# EAGLE board VCF-LM358-Stereo (EAGLE 7.6.0)
Voltage-Controlled Low-Pass Filter using LM358 Dual-Opamp (Stereo) http://electro-music.com/forum/topic-45231-0.html&postdays=0&postorder=asc&highlight=
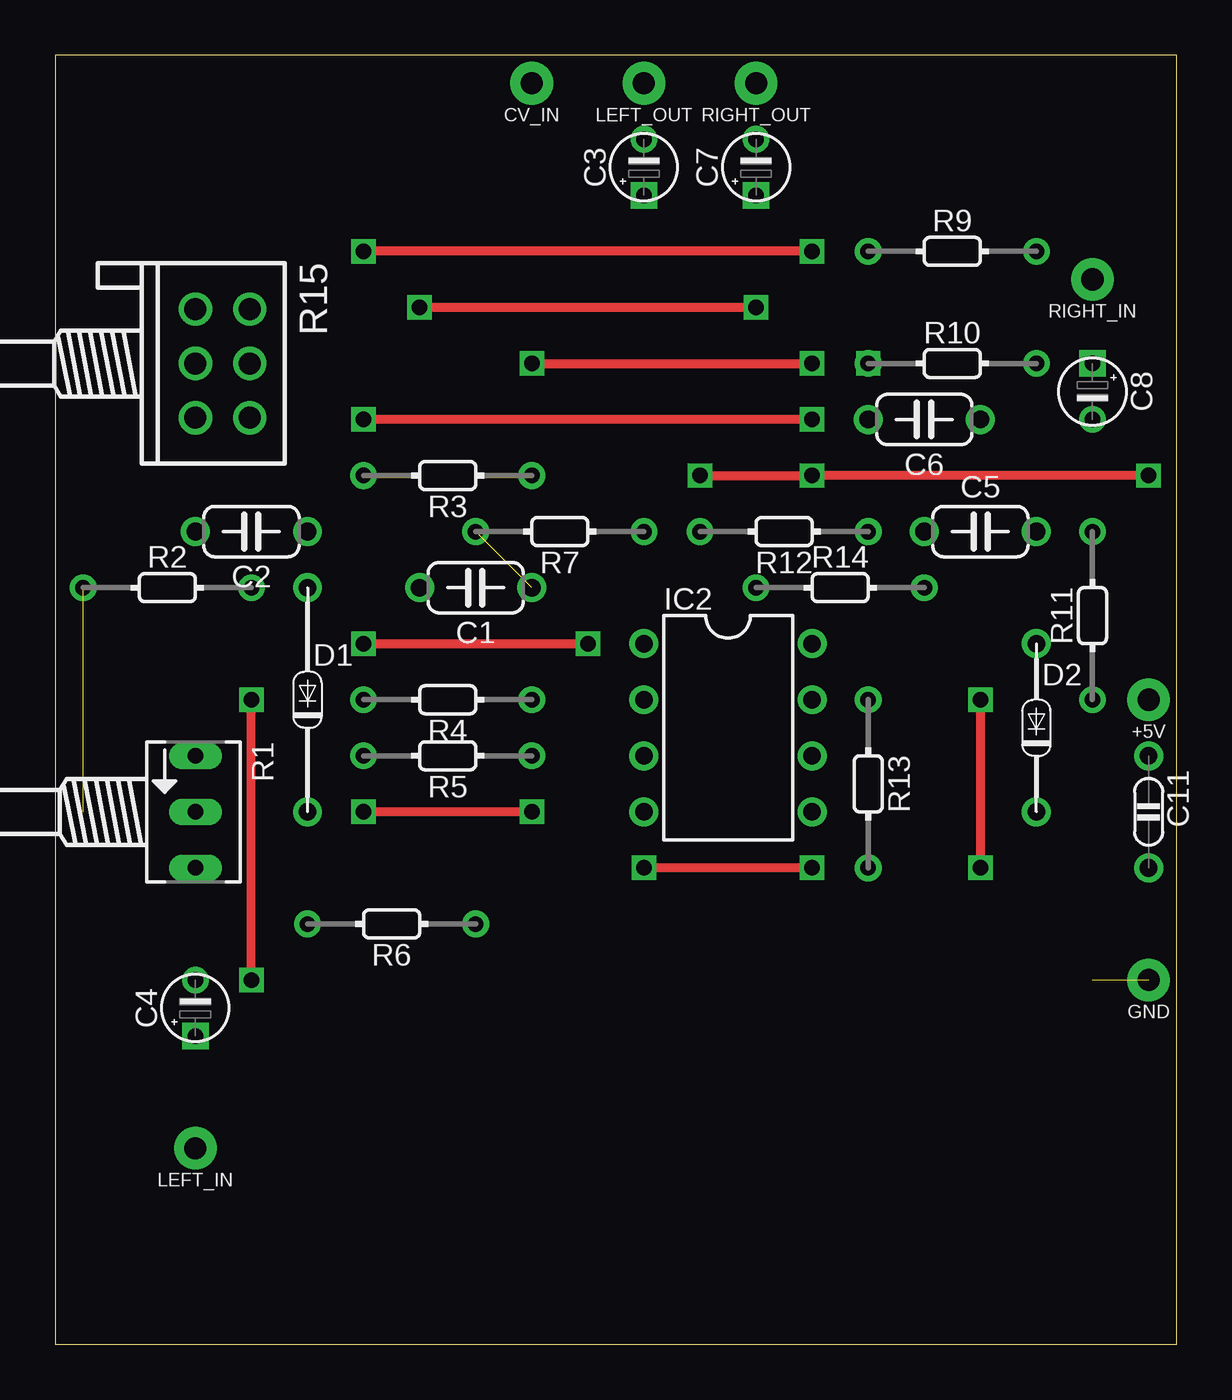
[diagram p0: board, top side]
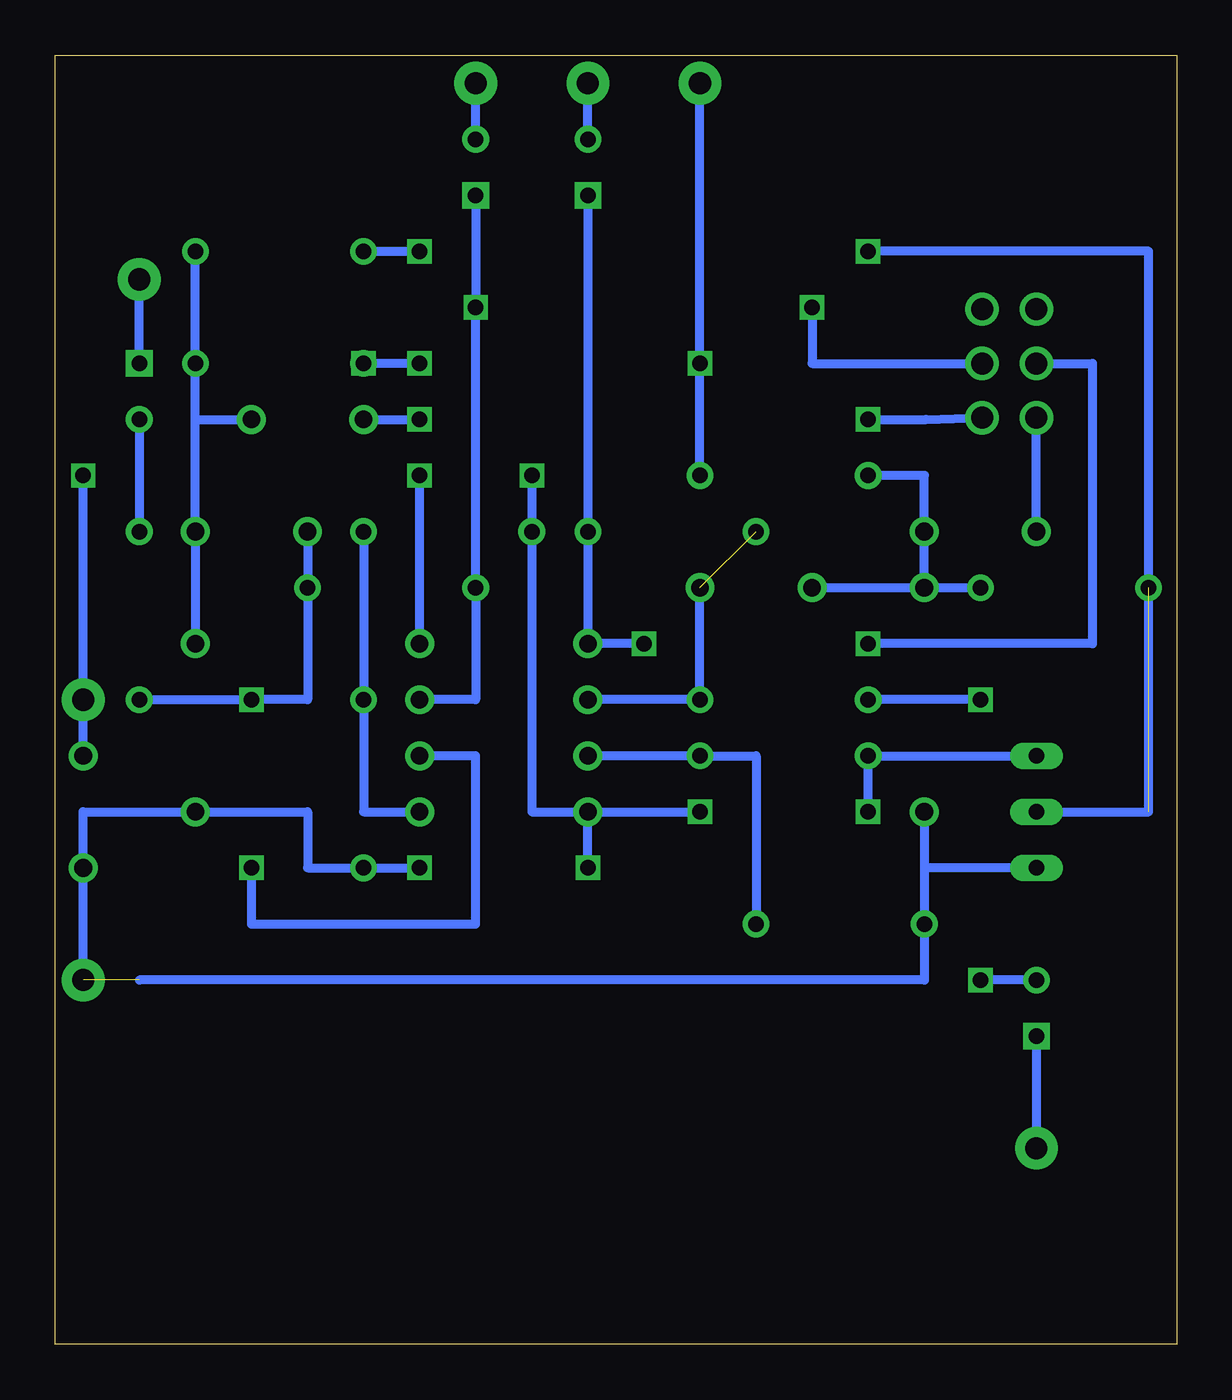
[diagram p1: board, bottom side, seen from below]

Size 50.8 x 58.42 mm. Coordinates in mm from the lower left corner, seen from the top.
Outline: 0,0 50.8,0 50.8,58.42 0,58.42 0,0
Copper layers (1*16): Top 0.035mm / dielectric 1.5mm / Bottom 0.035mm
Design rules "default": minimum track width 10mil, minimum drill 24mil, track to track 8mil, track to pad 8mil, pad to pad 8mil, via to via 8mil, smd to smd 8mil, copper to edge 40mil, drill to drill 8mil, minimum pad ring 10mil, minimum via ring 8mil, stop-mask expansion 4mil, vias tented up to drill 0mil, thermal gap 10mil

## Footprints (pad centres in the part's own frame; a part is rotated, then mirrored left to right if it is on the bottom)
SPAD = drill 1 pad 1.93: 1 0,0
C050-024X044 = drill 0.8: 1 -2.54,0; 2 2.54,0
E2,5-3 = drill 0.7 square: + 0,1.27 | drill 0.7: - 0,-1.27
C050-020X036 = drill 0.8: 1 -2.54,0; 2 2.54,0
DO34-10V = drill 0.8: A 0,5.08; C 0,-5.08
DO34-7V = drill 0.8: A 0,3.81; C 0,-3.81
DIL08 = drill 0.8 pad 1.27: 1 -3.81,-3.81; 2 -1.27,-3.81; 3 1.27,-3.81; 4 3.81,-3.81; 5 3.81,3.81; 6 1.27,3.81; 7 -1.27,3.81; 8 -3.81,3.81
B64Y = drill 0.7 long: A 2.54,0; E -2.54,0; S 0,0
0202/7 = drill 0.7: 1 0,3.81; 2 0,-3.81
POT-STEREO = drill 1: 1-1 -2.46,-2.54; 1-2 0,-2.54; 1-3 2.46,-2.54; 2-1 -2.46,-0.08; 2-2 0,-0.08; 2-3 2.46,-0.08

## Placement (x,y rotation side)
+5V  VCC  [SPAD]  49.53,29.21 90 top
C1  100nF  [C050-024X044]  19.05,34.29 180 top
C2  100nF  [C050-024X044]  8.89,36.83 180 top
C3  1uF  [E2,5-3]  26.67,53.34 180 top
C4  1uF  [E2,5-3]  6.35,15.24 180 top
C5  100nF  [C050-024X044]  41.91,36.83 0 top
C6  100nF  [C050-024X044]  39.37,41.91 180 top
C7  1uF  [E2,5-3]  31.75,53.34 180 top
C8  1uF  [E2,5-3]  46.99,43.18 0 top
C11  100nF  [C050-020X036]  49.53,24.13 270 top
CV_IN  CV_IN  [SPAD]  21.59,57.15 90 top
D1  1N4148  [DO34-10V]  11.43,29.21 0 top
D2  1N4148  [DO34-7V]  44.45,27.94 0 top
GND  GND  [SPAD]  49.53,16.51 90 top
IC2  LM358N  [DIL08]  30.48,27.94 270 top
LEFT_IN  AUDIO_IN  [SPAD]  6.35,8.89 90 top
LEFT_OUT  AUDIO_OUT  [SPAD]  26.67,57.15 90 top
R1  100k  [B64Y]  6.35,24.13 270 top
R2  1k  [0202/7]  5.08,34.29 270 top
R3  1k  [0202/7]  17.78,39.37 90 top
R4  470k  [0202/7]  17.78,29.21 90 top
R5  100k  [0202/7]  17.78,26.67 90 top
R6  100k  [0202/7]  15.24,19.05 90 top
R7  100k  [0202/7]  22.86,36.83 90 top
R9  1k  [0202/7]  40.64,49.53 270 top
R10  1k  [0202/7]  40.64,44.45 270 top
R11  470k  [0202/7]  46.99,33.02 0 top
R12  100k  [0202/7]  33.02,36.83 90 top
R13  100k  [0202/7]  36.83,25.4 180 top
R14  100k  [0202/7]  35.56,34.29 270 top
R15  10k  [POT-STEREO]  8.89,44.45 270 top
RIGHT_IN  AUDIO_IN  [SPAD]  46.99,48.26 90 top
RIGHT_OUT  AUDIO_OUT  [SPAD]  31.75,57.15 90 top

## Library data of the parts
+5V CV_IN GND LEFT_IN LEFT_OUT RIGHT_IN RIGHT_OUT = pad
C1-C8 C11 = c
D1 D2 = d
IC2 = ic
R1-R7 R9-R15 = r

## Nets
GND: C11.2 D1.C D2.C GND.1 IC2.4 R1.A R6.1 R13.1
N$1: C4.+ LEFT_IN.1
N$2: C1.1 IC2.2 R4.2 R7.1
N$3: C2.2 R15.1-3
N$4: C3.+ IC2.1 R7.2 R15.1-2
N$5: R1.S R2.2 R9.2
N$6: C3.- LEFT_OUT.1
N$7: IC2.3 R5.2 R6.2
N$8: CV_IN.1 R3.2 R10.2
N$9: C1.2 C2.1 D1.A R2.1 R3.1
N$10: C4.- R4.1
N$11: C6.2 R15.2-3
N$12: C7.+ IC2.7 R14.2 R15.2-2
N$13: IC2.5 R12.2 R13.2
N$16: C5.2 C6.1 D2.A R9.1 R10.1
N$17: C5.1 IC2.6 R11.2 R14.1
N$18: C7.- RIGHT_OUT.1
N$19: C8.+ RIGHT_IN.1
N$20: C8.- R11.1
VCC: +5V.1 C11.1 IC2.8 R1.E R5.1 R12.1

## Tracks (layer width: path | path; a pad name or v marks a point on that pad's centre or on a via)
GND  (via drill 0.7)  (2 unrouted)
  Top 0.406: v34.29,21.59 v26.67,21.59
  Bottom 0.406: v34.29,21.59 R13.1 39.37,21.59 39.37,24.13 D2.C 49.53,24.13 C11.2 GND.1 | D1.C R6.1 | R1.A 11.43,21.59 R6.1 | R6.1 11.43,16.51 46.99,16.51 | v26.67,21.59 IC2.4
N$1
  Bottom 0.406: C4.+ LEFT_IN.1
N$2  (1 unrouted)
  Bottom 0.406: C1.1 R4.2 IC2.2
N$3
  Bottom 0.406: C2.2 R15.1-3
N$4  (via drill 0.7)
  Top 0.406: v13.97,31.75 v24.13,31.75
  Bottom 0.406: C3.+ R7.2 IC2.1 v24.13,31.75 | R15.1-2 3.81,44.45 3.81,31.75 v13.97,31.75
N$5  (via drill 0.7)  (1 unrouted)
  Top 0.406: v34.29,49.53 v13.97,49.53
  Bottom 0.406: R1.S 1.27,24.13 1.27,49.53 v13.97,49.53 | R9.2 v34.29,49.53
N$6
  Bottom 0.406: C3.- LEFT_OUT.1
N$7
  Bottom 0.406: R6.2 19.05,26.67 R5.2 IC2.3
N$8  (via drill 0.7)
  Top 0.406: v21.59,44.45 v34.29,44.45
  Bottom 0.406: v21.59,44.45 R3.2 CV_IN.1 | v34.29,44.45 R10.2
  other vias: 36.83,44.45
N$9
  Bottom 0.406: C1.2 D1.A | D1.A C2.1 11.43,39.37 R3.1 | D1.A R2.1
N$10  (via drill 0.7)
  Top 0.406: v8.89,16.51 v8.89,29.21
  Bottom 0.406: C4.- v8.89,16.51 | v8.89,29.21 R4.1
N$11  (via drill 0.7)
  Top 0.406: v34.29,41.91 v13.97,41.91
  Bottom 0.406: C6.2 v34.29,41.91 | v13.97,41.91 11.35,41.91 R15.2-3
N$12  (via drill 0.7)
  Top 0.406: v31.75,46.99 v16.51,46.99
  Bottom 0.406: C7.+ v31.75,46.99 R14.2 31.75,29.21 IC2.7 | v16.51,46.99 16.51,44.45 R15.2-2
N$13
  Bottom 0.406: R12.2 R13.2 36.83,24.13 IC2.5
N$16
  Bottom 0.406: D2.A C5.2 44.45,41.91 | 44.45,41.91 R10.1 R9.1 | 44.45,41.91 C6.1
N$17  (via drill 0.7)
  Top 0.406: v41.91,29.21 v41.91,21.59
  Bottom 0.406: R11.2 v41.91,29.21 39.37,29.21 R14.1 C5.1 | v41.91,21.59 41.91,19.05 31.75,19.05 31.75,26.67 IC2.6
N$18
  Bottom 0.406: C7.- RIGHT_OUT.1
N$19
  Bottom 0.406: C8.+ RIGHT_IN.1
N$20
  Bottom 0.406: C8.- R11.1
VCC  (via drill 0.7)
  Top 0.406: v21.59,24.13 v13.97,24.13 | v49.53,39.37 v34.29,39.37 v29.21,39.37
  Bottom 0.406: v13.97,24.13 R5.1 R1.E | C11.1 +5V.1 v49.53,39.37 | v29.21,39.37 R12.1 29.21,24.13 v21.59,24.13 | IC2.8 v34.29,39.37